# EAGLE board Con_Raspi (EAGLE 6.4)
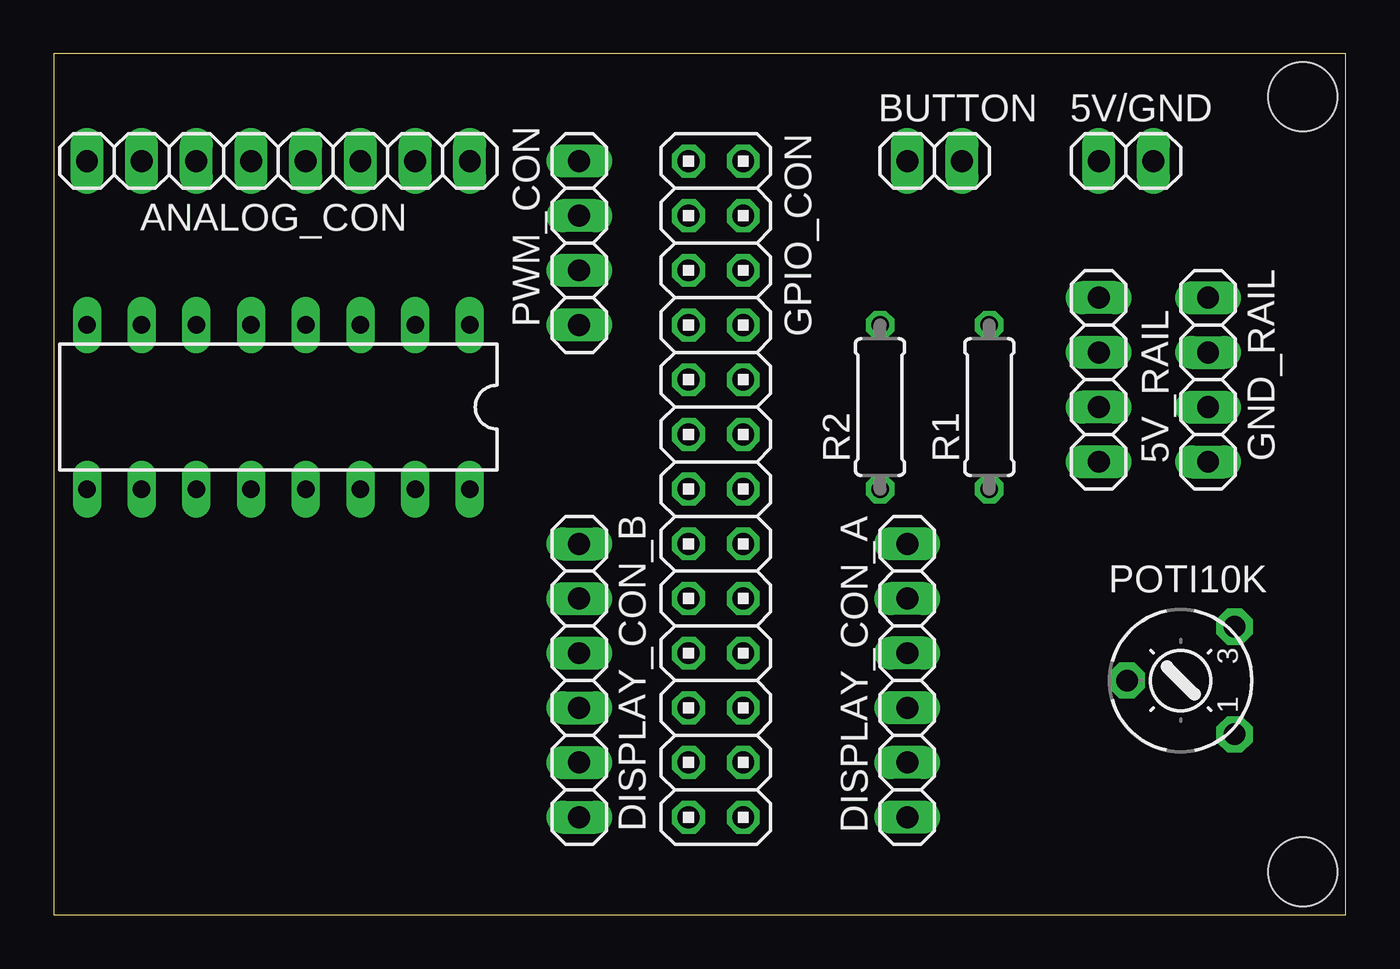
[diagram p0: board, top side]
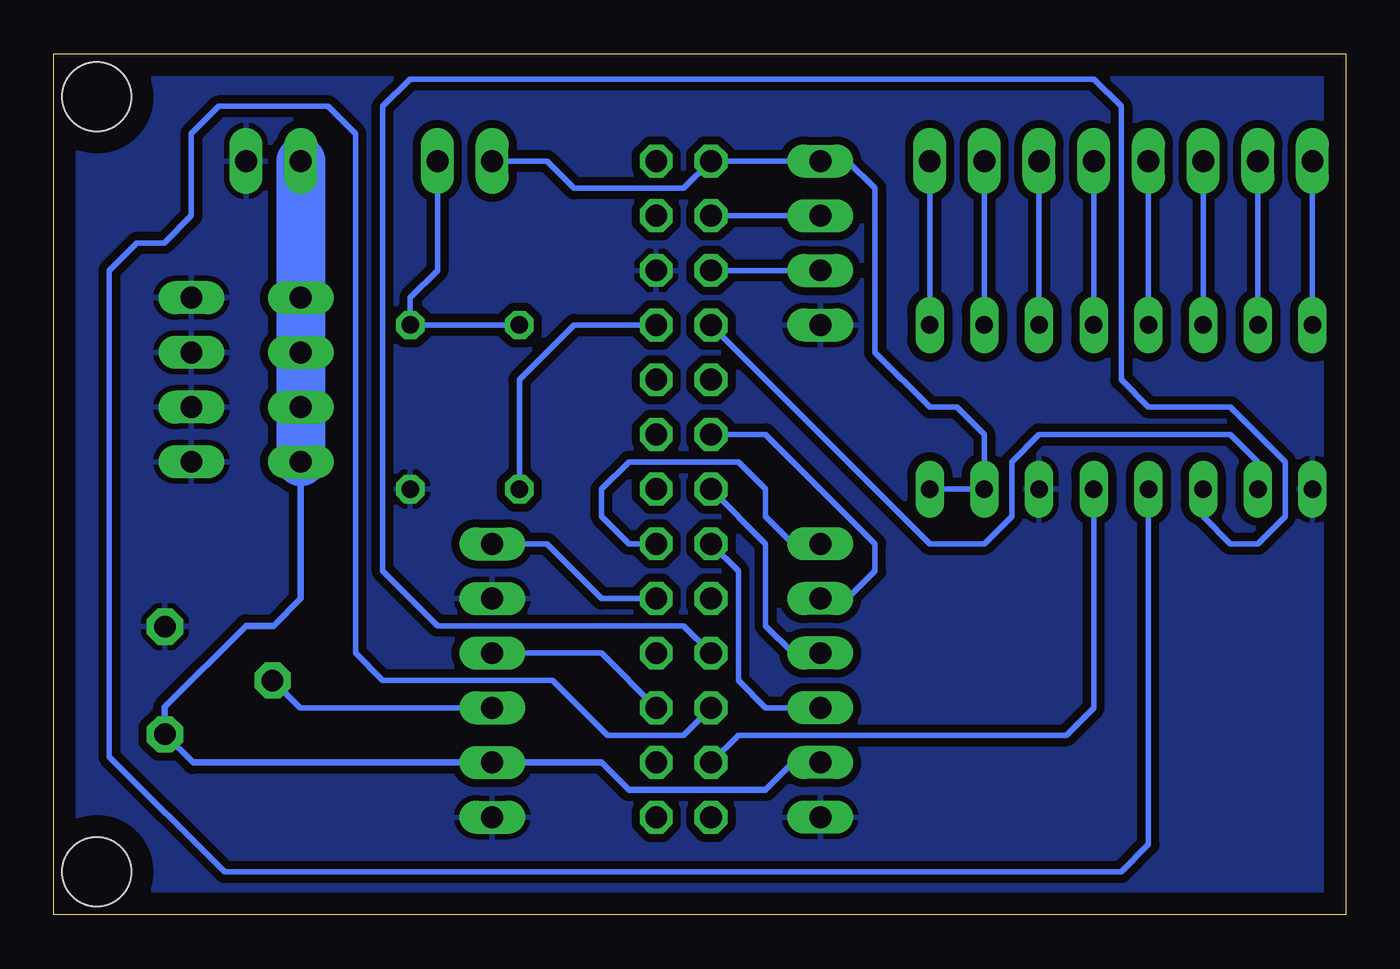
[diagram p1: board, bottom side, seen from below]

Size 60 x 40 mm. Coordinates in mm from the lower left corner, seen from the top.
Outline: 60,0 60,40 0,40 0,0 60,0
Copper layers (1*16): Top 0.035mm / dielectric 1.5mm / Bottom 0.035mm
Design rules "default *": minimum track width 12mil, minimum drill 32mil, track to track 12mil, track to pad 12mil, pad to pad 12mil, via to via 12mil, smd to smd 12mil, copper to edge 40mil, drill to drill 10mil, minimum pad ring 10mil, minimum via ring 8mil, stop-mask expansion 4mil, vias tented up to drill 0mil, thermal gap 10mil
Holes 3.2 mm at 58,2 58,38

## Footprints (pad centres in the part's own frame; a part is rotated, then mirrored left to right if it is on the bottom)
1X02 = drill 1.016 long: 1 -1.27,0; 2 1.27,0
1X04 = drill 1.016 long: 1 -3.81,0; 2 -1.27,0; 3 1.27,0; 4 3.81,0
1X08 = drill 1.016 long: 1 -8.89,0; 2 -6.35,0; 3 -3.81,0; 4 -1.27,0; 5 1.27,0; 6 3.81,0; 7 6.35,0; 8 8.89,0
DIL16 = drill 0.813 long: 1 -8.89,-3.81; 2 -6.35,-3.81; 3 -3.81,-3.81; 4 -1.27,-3.81; 5 1.27,-3.81; 6 3.81,-3.81; 7 6.35,-3.81; 8 8.89,-3.81; 9 8.89,3.81; 10 6.35,3.81; 11 3.81,3.81; 12 1.27,3.81; 13 -1.27,3.81; 14 -3.81,3.81; 15 -6.35,3.81; 16 -8.89,3.81
1X06 = drill 1.016 long: 1 -6.35,0; 2 -3.81,0; 3 -1.27,0; 4 1.27,0; 5 3.81,0; 6 6.35,0
2X13 = drill 1.016 octagon: 1 -15.24,-1.27; 2 -15.24,1.27; 3 -12.7,-1.27; 4 -12.7,1.27; 5 -10.16,-1.27; 6 -10.16,1.27; 7 -7.62,-1.27; 8 -7.62,1.27; 9 -5.08,-1.27; 10 -5.08,1.27; 11 -2.54,-1.27; 12 -2.54,1.27; 13 0,-1.27; 14 0,1.27; 15 2.54,-1.27; 16 2.54,1.27; 17 5.08,-1.27; 18 5.08,1.27; 19 7.62,-1.27; 20 7.62,1.27; 21 10.16,-1.27; 22 10.16,1.27; 23 12.7,-1.27; 24 12.7,1.27; 25 15.24,-1.27; 26 15.24,1.27
6MM = drill 1 pad 1.676 octagon: A -2.5,-2.5; E 2.5,-2.5; S 0,2.5
0207/7 = drill 0.813 octagon: 1 -3.81,0; 2 3.81,0

## Placement (x,y rotation side)
5V/GND  [1X02]  49.8,35.02 0 top
5V_RAIL  [1X04]  48.53,24.86 90 top
ANALOG_CON  [1X08]  10.43,35.02 0 top
ANALOG_IN  MCP3008  [DIL16]  10.43,23.59 180 top
BUTTON  [1X02]  40.91,35.02 0 top
DISPLAY_CON_A  [1X06]  39.64,10.89 90 top
DISPLAY_CON_B  [1X06]  24.4,10.89 270 top
GND_RAIL  [1X04]  53.61,24.86 270 top
GPIO_CON  [2X13]  30.75,19.78 270 top
POTI10K  [6MM]  52.34,10.89 90 top
PWM_CON  [1X04]  24.4,31.21 90 top
R1  10k  [0207/7]  43.45,23.59 90 top
R2  1k  [0207/7]  38.37,23.59 90 top

## Library data of the parts
5V/GND 5V_RAIL ANALOG_CON BUTTON DISPLAY_CON_A DISPLAY_CON_B GND_RAIL GPIO_CON PWM_CON = pinhead
ANALOG_IN POTI10K = adafruit
R1 R2 = rcl

## Nets
3V3: ANALOG_IN.15 ANALOG_IN.16 BUTTON.1 GPIO_CON.1 PWM_CON.4
+5V: 5V/GND.1 5V_RAIL.1 5V_RAIL.2 5V_RAIL.3 5V_RAIL.4 DISPLAY_CON_A.2 DISPLAY_CON_B.5 POTI10K.A
BUTTON_INPUT: GPIO_CON.8 R2.1
CLK: ANALOG_IN.13 GPIO_CON.23
CS: ANALOG_IN.10 GPIO_CON.7
DB4: DISPLAY_CON_B.1 GPIO_CON.16
DB5: DISPLAY_CON_B.2 GPIO_CON.11
DB6: DISPLAY_CON_B.3 GPIO_CON.13
DB7: DISPLAY_CON_B.4 GPIO_CON.15
ENABLE: DISPLAY_CON_A.6 GPIO_CON.18
GND: 5V/GND.2 ANALOG_IN.9 ANALOG_IN.14 DISPLAY_CON_A.1 DISPLAY_CON_A.5 DISPLAY_CON_B.6 GND_RAIL.1 GND_RAIL.2 GND_RAIL.3 GND_RAIL.4 GPIO_CON.6 POTI10K.E PWM_CON.1 R1.1
MISO: ANALOG_IN.12 GPIO_CON.21
MOSI: ANALOG_IN.11 GPIO_CON.19
N$1: ANALOG_CON.1 ANALOG_IN.8
N$2: ANALOG_CON.2 ANALOG_IN.7
N$3: ANALOG_CON.3 ANALOG_IN.6
N$4: ANALOG_CON.4 ANALOG_IN.5
N$5: ANALOG_CON.5 ANALOG_IN.4
N$6: ANALOG_CON.6 ANALOG_IN.3
N$7: ANALOG_CON.7 ANALOG_IN.2
N$8: ANALOG_CON.8 ANALOG_IN.1
N$9: DISPLAY_CON_A.3 POTI10K.S
N$12: BUTTON.2 R1.2 R2.2
RS: DISPLAY_CON_A.4 GPIO_CON.22
SCL: GPIO_CON.5 PWM_CON.2
SDA: GPIO_CON.3 PWM_CON.3

## Tracks (layer width: path | path; a pad name or v marks a point on that pad's centre or on a via)
3V3
  Bottom 0.254: ANALOG_IN.16 ANALOG_IN.15 16.78,22.32 18.05,23.59 19.32,23.59 21.86,26.13 21.86,33.75 23.13,35.02 PWM_CON.4 GPIO_CON.1 30.75,33.75 35.83,33.75 37.1,35.02 BUTTON.1
+5V
  Bottom 0.305: 5V_RAIL.1 48.53,14.7 49.8,13.43 51.07,13.43 54.84,9.66 POTI10K.A 53.53,7.08 DISPLAY_CON_A.2 34.56,7.08 33.29,5.81 26.94,5.81 25.67,7.08 DISPLAY_CON_B.5
  Bottom 2.286: 5V/GND.1 5V_RAIL.4 5V_RAIL.3 5V_RAIL.2 5V_RAIL.1
BUTTON_INPUT
  Bottom 0.254: GPIO_CON.8 35.83,27.4 38.37,24.86 R2.1
CLK
  Bottom 0.254: ANALOG_IN.13 11.7,9.62 12.97,8.35 28.21,8.35 GPIO_CON.23
CS
  Bottom 0.254: GPIO_CON.7 19.32,17.24 16.78,17.24 15.51,18.51 15.51,21.05 14.24,22.32 5.35,22.32 4.08,21.05 ANALOG_IN.10
DB4
  Bottom 0.254: DISPLAY_CON_B.1 25.67,17.24 26.94,18.51 26.94,19.78 28.21,21.05 33.29,21.05 34.56,19.78 34.56,18.51 33.29,17.24 GPIO_CON.16
DB5
  Bottom 0.254: DISPLAY_CON_B.2 23.13,14.7 21.86,15.97 21.86,17.24 26.94,22.32 GPIO_CON.11
DB6
  Bottom 0.254: DISPLAY_CON_B.3 25.67,12.16 26.94,13.43 26.94,17.24 GPIO_CON.13
DB7
  Bottom 0.254: DISPLAY_CON_B.4 26.94,9.62 28.21,10.89 28.21,15.97 GPIO_CON.15
ENABLE
  Bottom 0.254: GPIO_CON.18 34.56,14.7 37.1,17.24 DISPLAY_CON_A.6
GND
  pour Bottom (isolate 0.381): 0,40 60,40 60,0 0,0
MISO
  Bottom 0.254: GPIO_CON.21 30.75,8.35 34.29,8.35 36.83,10.89 44.72,10.89 45.99,12.16 45.99,36.29 47.26,37.56 52.34,37.56 53.61,36.29 53.61,32.48 54.88,31.21 56.15,31.21 57.42,29.94 57.42,7.35 52.07,2 10.43,2 9.16,3.27 ANALOG_IN.12
MOSI
  Bottom 0.254: GPIO_CON.19 30.75,13.43 42.18,13.43 44.72,15.97 44.72,37.56 43.45,38.83 11.7,38.83 10.43,37.56 10.43,24.86 9.16,23.59 5.35,23.59 2.81,21.05 2.81,18.51 4.08,17.24 5.35,17.24 6.62,18.51 ANALOG_IN.11
N$1
  Bottom 0.254: ANALOG_IN.8 ANALOG_CON.1
N$2
  Bottom 0.254: ANALOG_CON.2 ANALOG_IN.7
N$3
  Bottom 0.254: ANALOG_CON.3 ANALOG_IN.6
N$4
  Bottom 0.254: ANALOG_CON.4 ANALOG_IN.5
N$5
  Bottom 0.254: ANALOG_CON.5 ANALOG_IN.4
N$6
  Bottom 0.254: ANALOG_CON.6 ANALOG_IN.3
N$7
  Bottom 0.254: ANALOG_CON.7 ANALOG_IN.2
N$8
  Bottom 0.254: ANALOG_CON.8 ANALOG_IN.1
N$9
  Bottom 0.254: DISPLAY_CON_A.3 48.57,9.62 POTI10K.S
N$12
  Bottom 0.254: R2.2 R1.2 43.45,28.67 42.18,29.94 BUTTON.2
RS
  Bottom 0.254: DISPLAY_CON_A.4 34.56,12.16 GPIO_CON.22
SCL
  Bottom 0.254: PWM_CON.2 GPIO_CON.5
SDA
  Bottom 0.254: GPIO_CON.3 PWM_CON.3

## Text on the board
Name: CH7 | CH1 | Pin1 | LCD-Pin11 | LCD-Pin6 | LCD-Pin16 | LCD-Pin1